# Altium PCB FMCOMMS3 - 副本 (2).PcbDoc (part 1 of 2)
Units mil, origin at the board's own origin, x right, y up, seen from the top; angles counter-clockwise.
Board outline 6000 x 4000 mil, 4 copper layers (Top Layer, Layer 1, Layer 2, Bottom Layer), stack 23.756 mil thick; 166 components, 138 nets, 751 pads, 368 vias.
Unrouted connection lines stored in the file: 399.
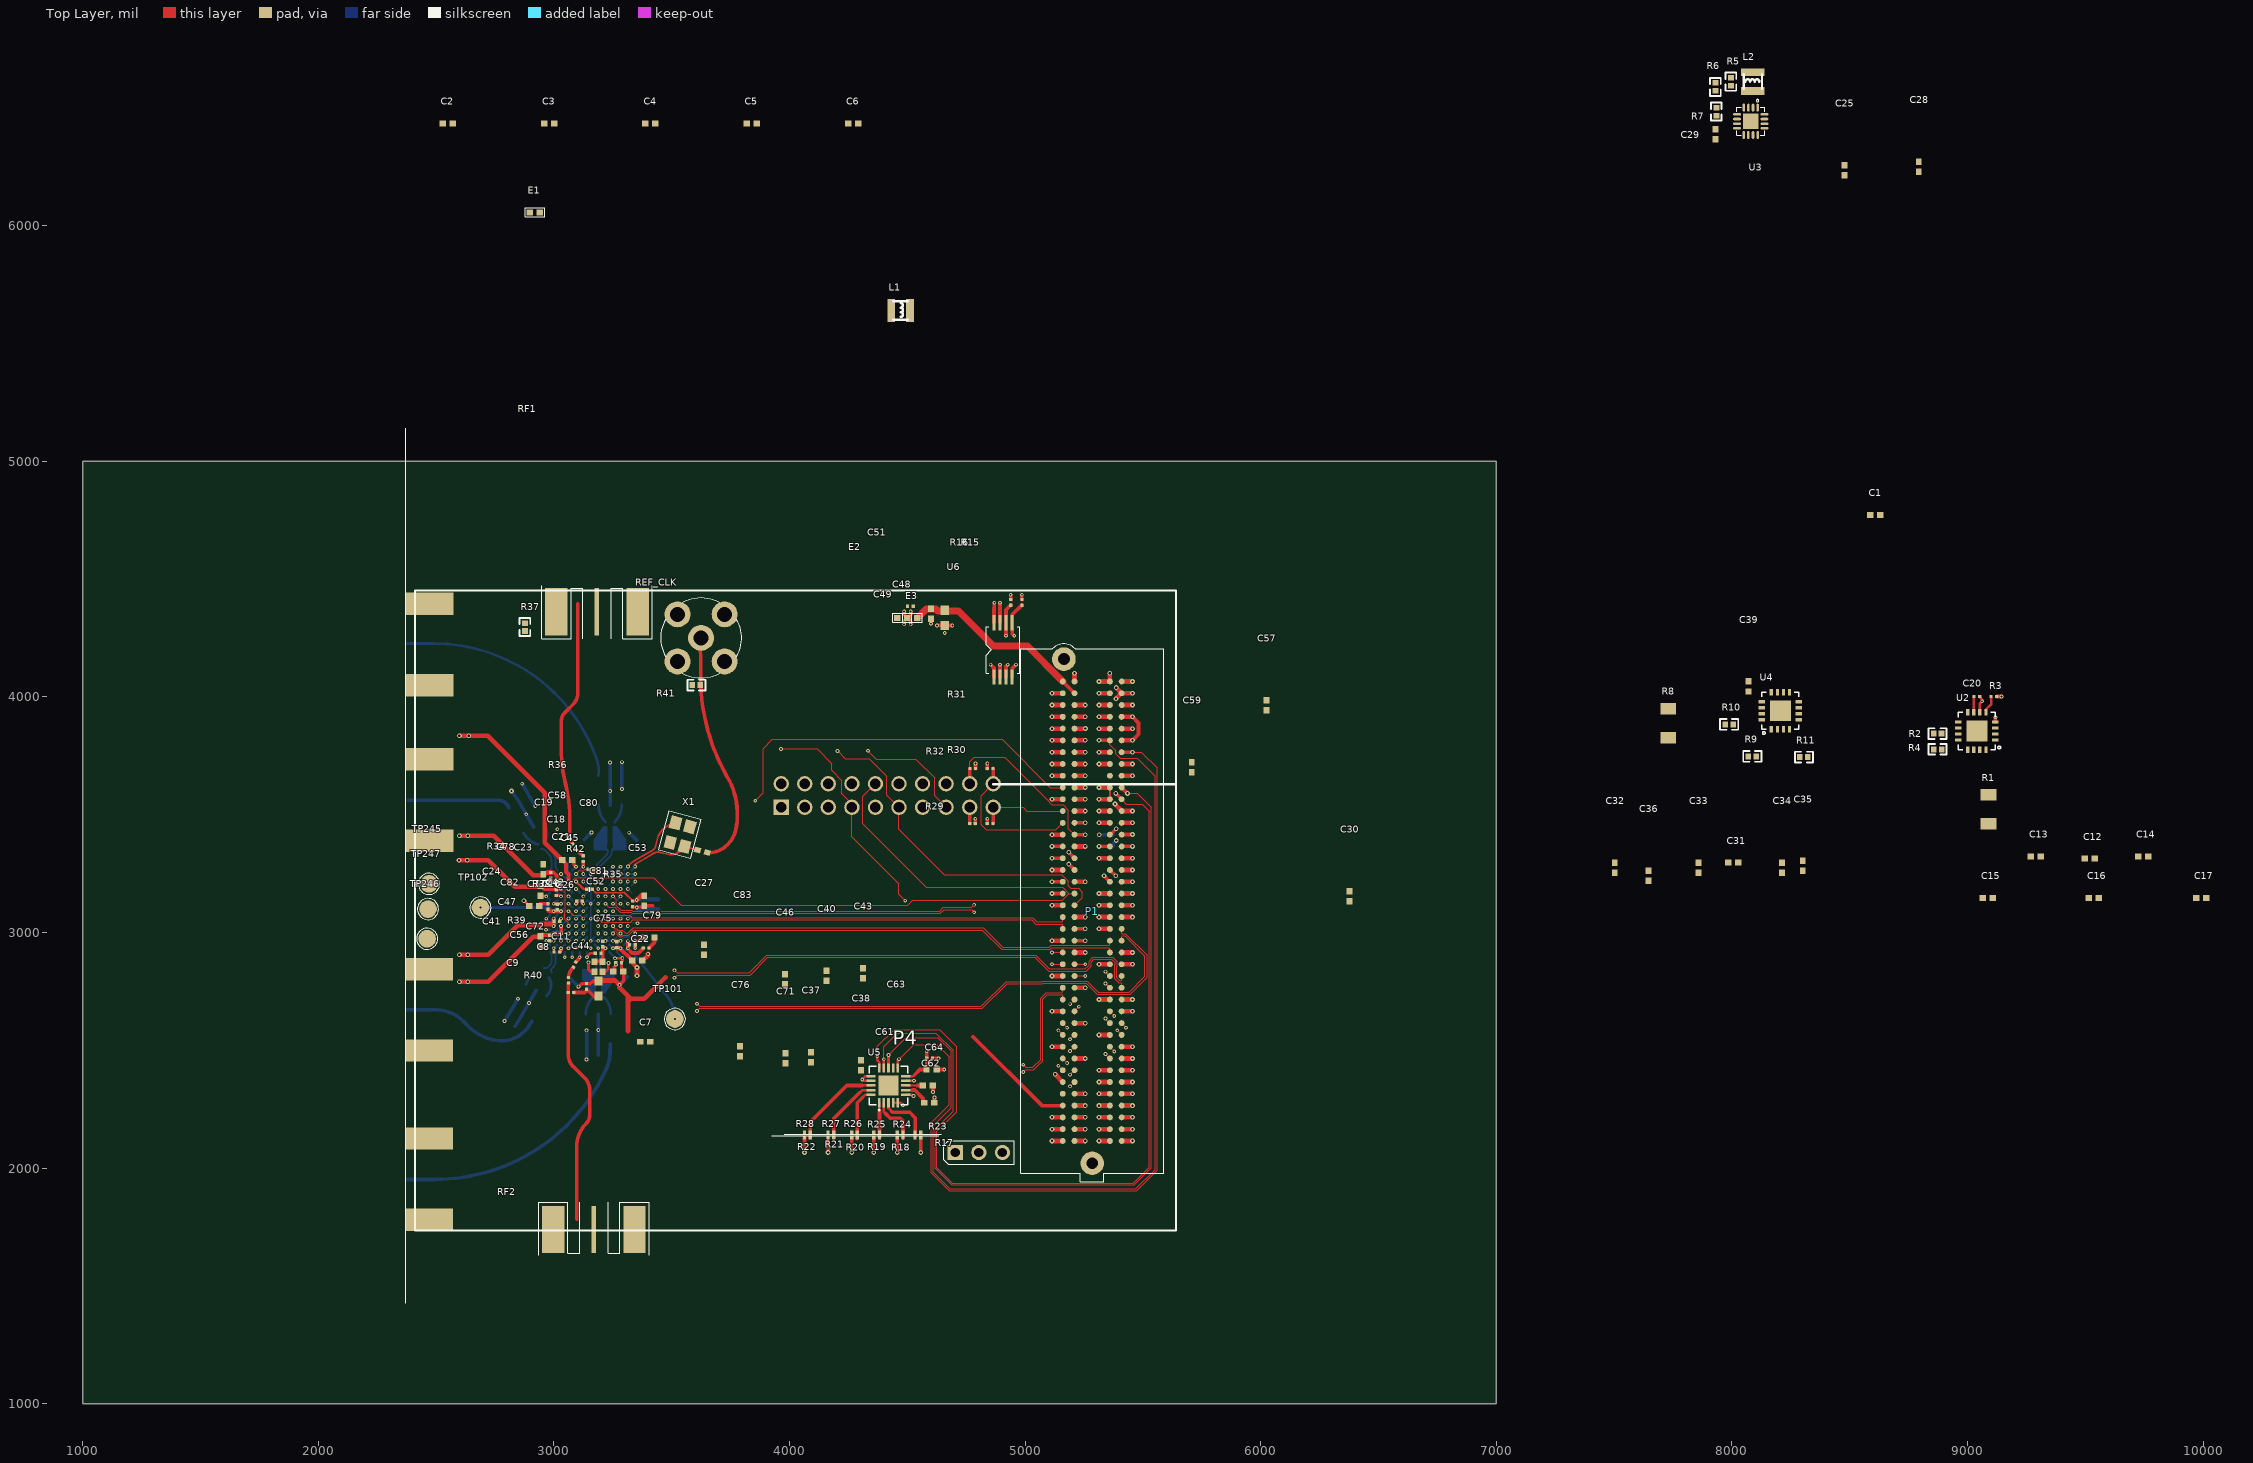
[diagram p0: Top Layer view]
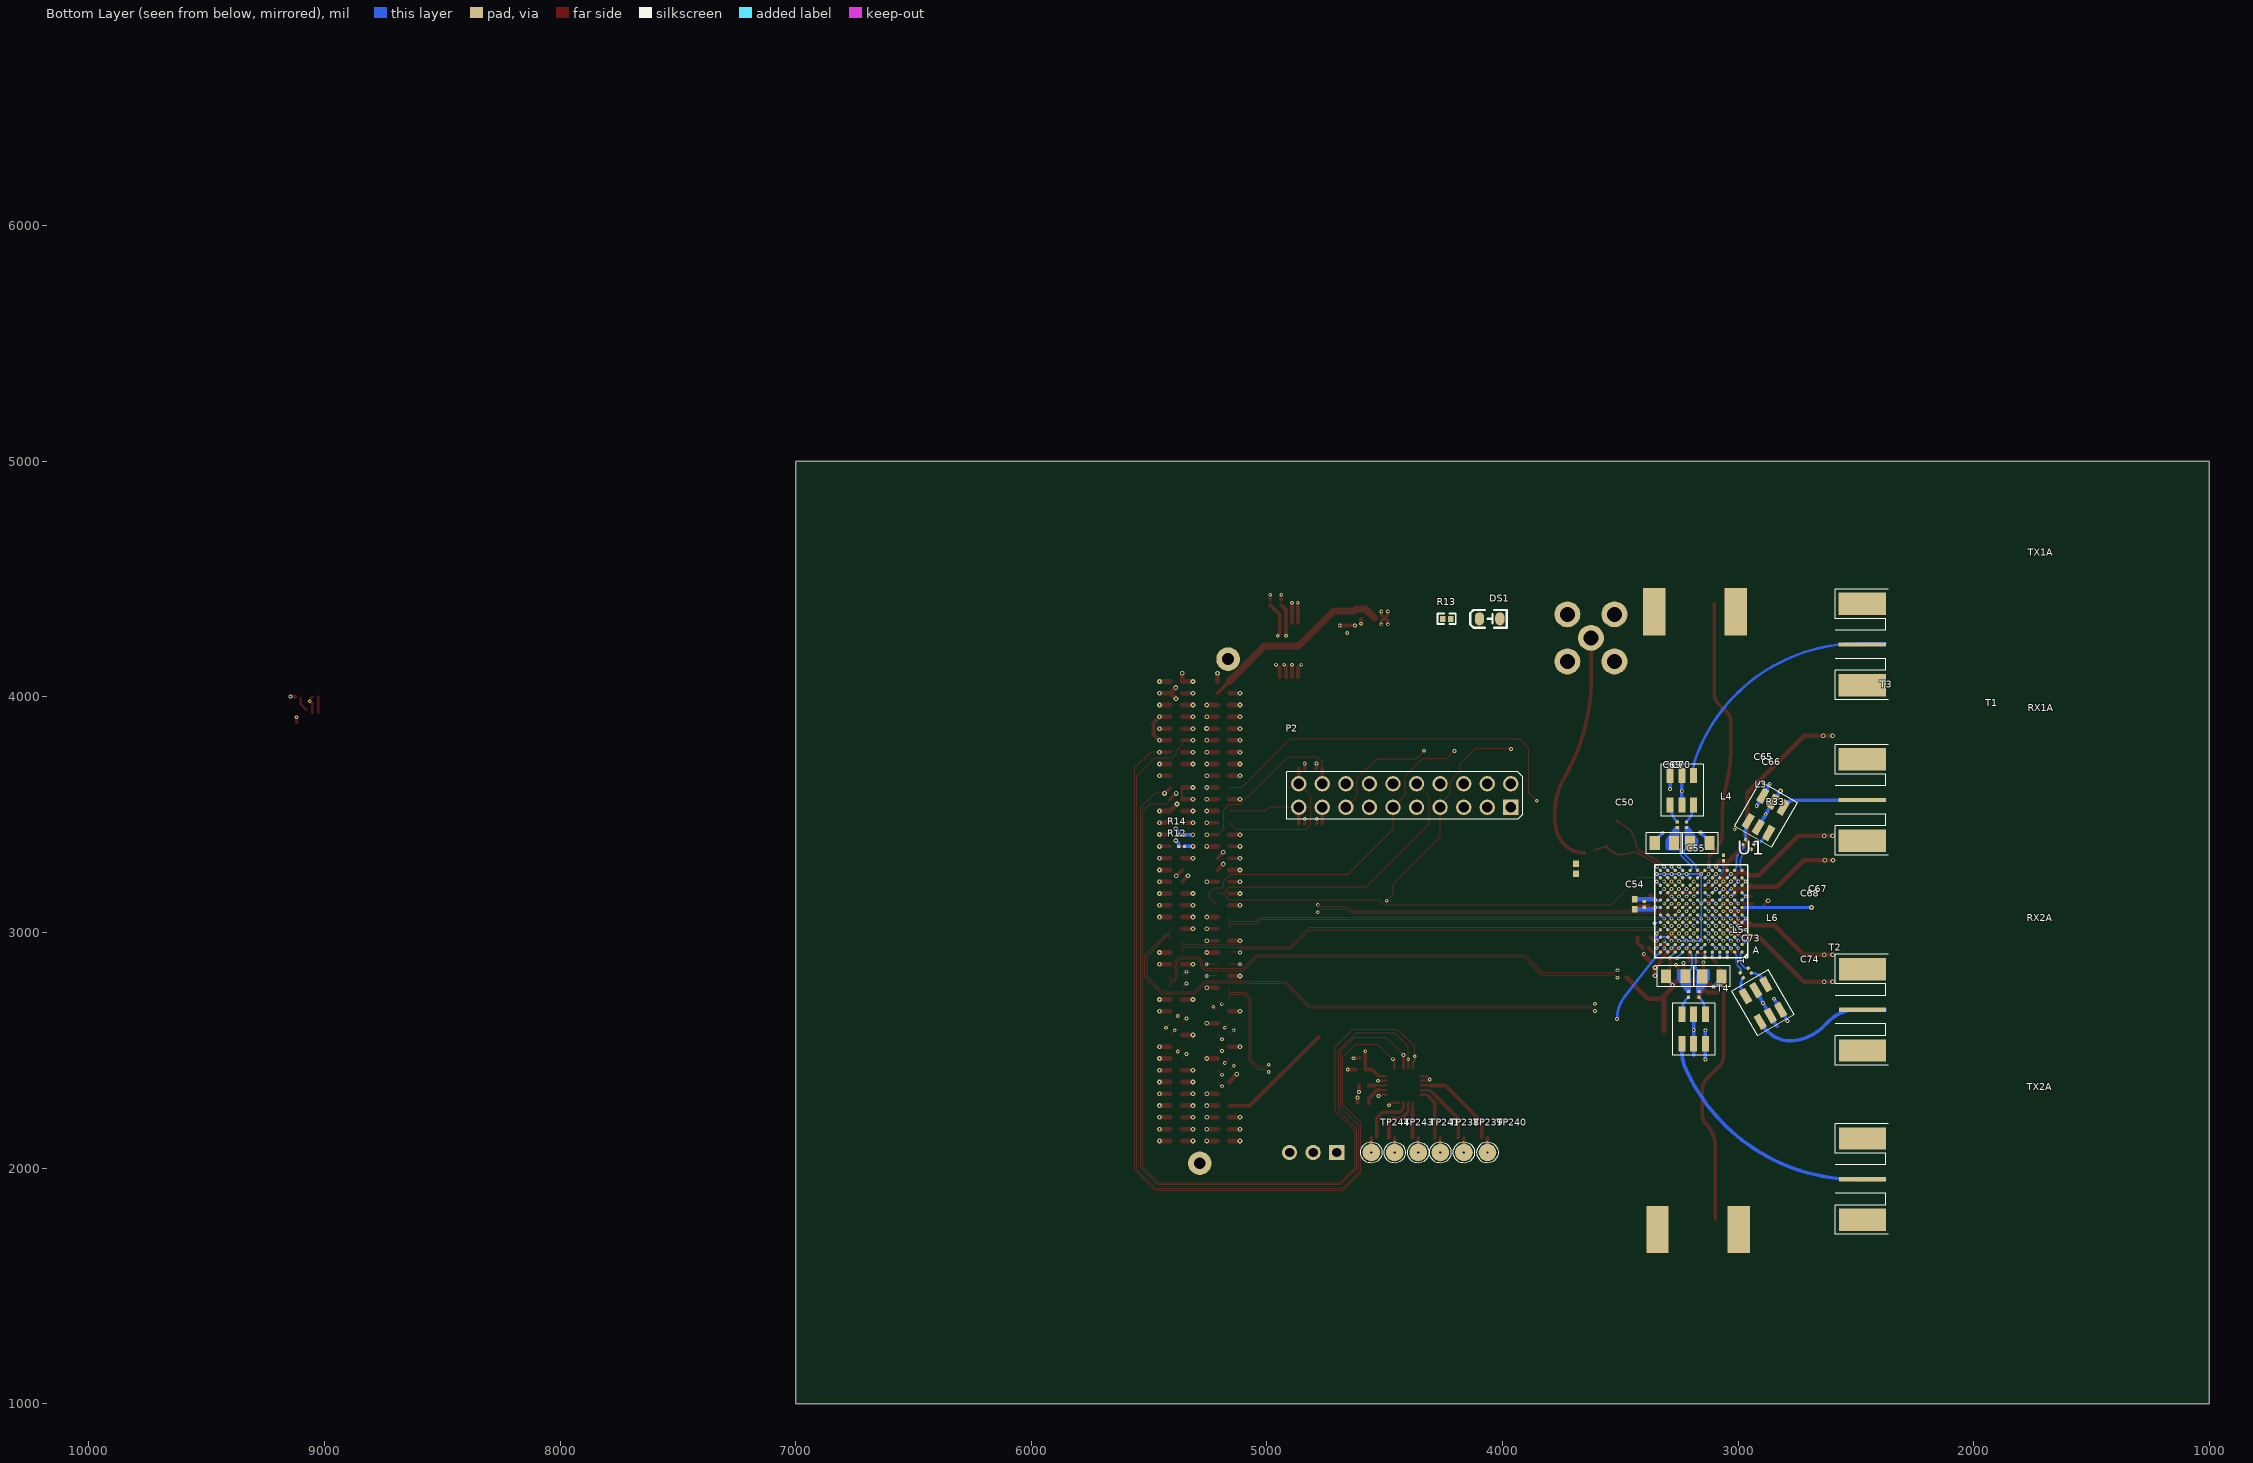
[diagram p1: Bottom Layer view, seen from below]
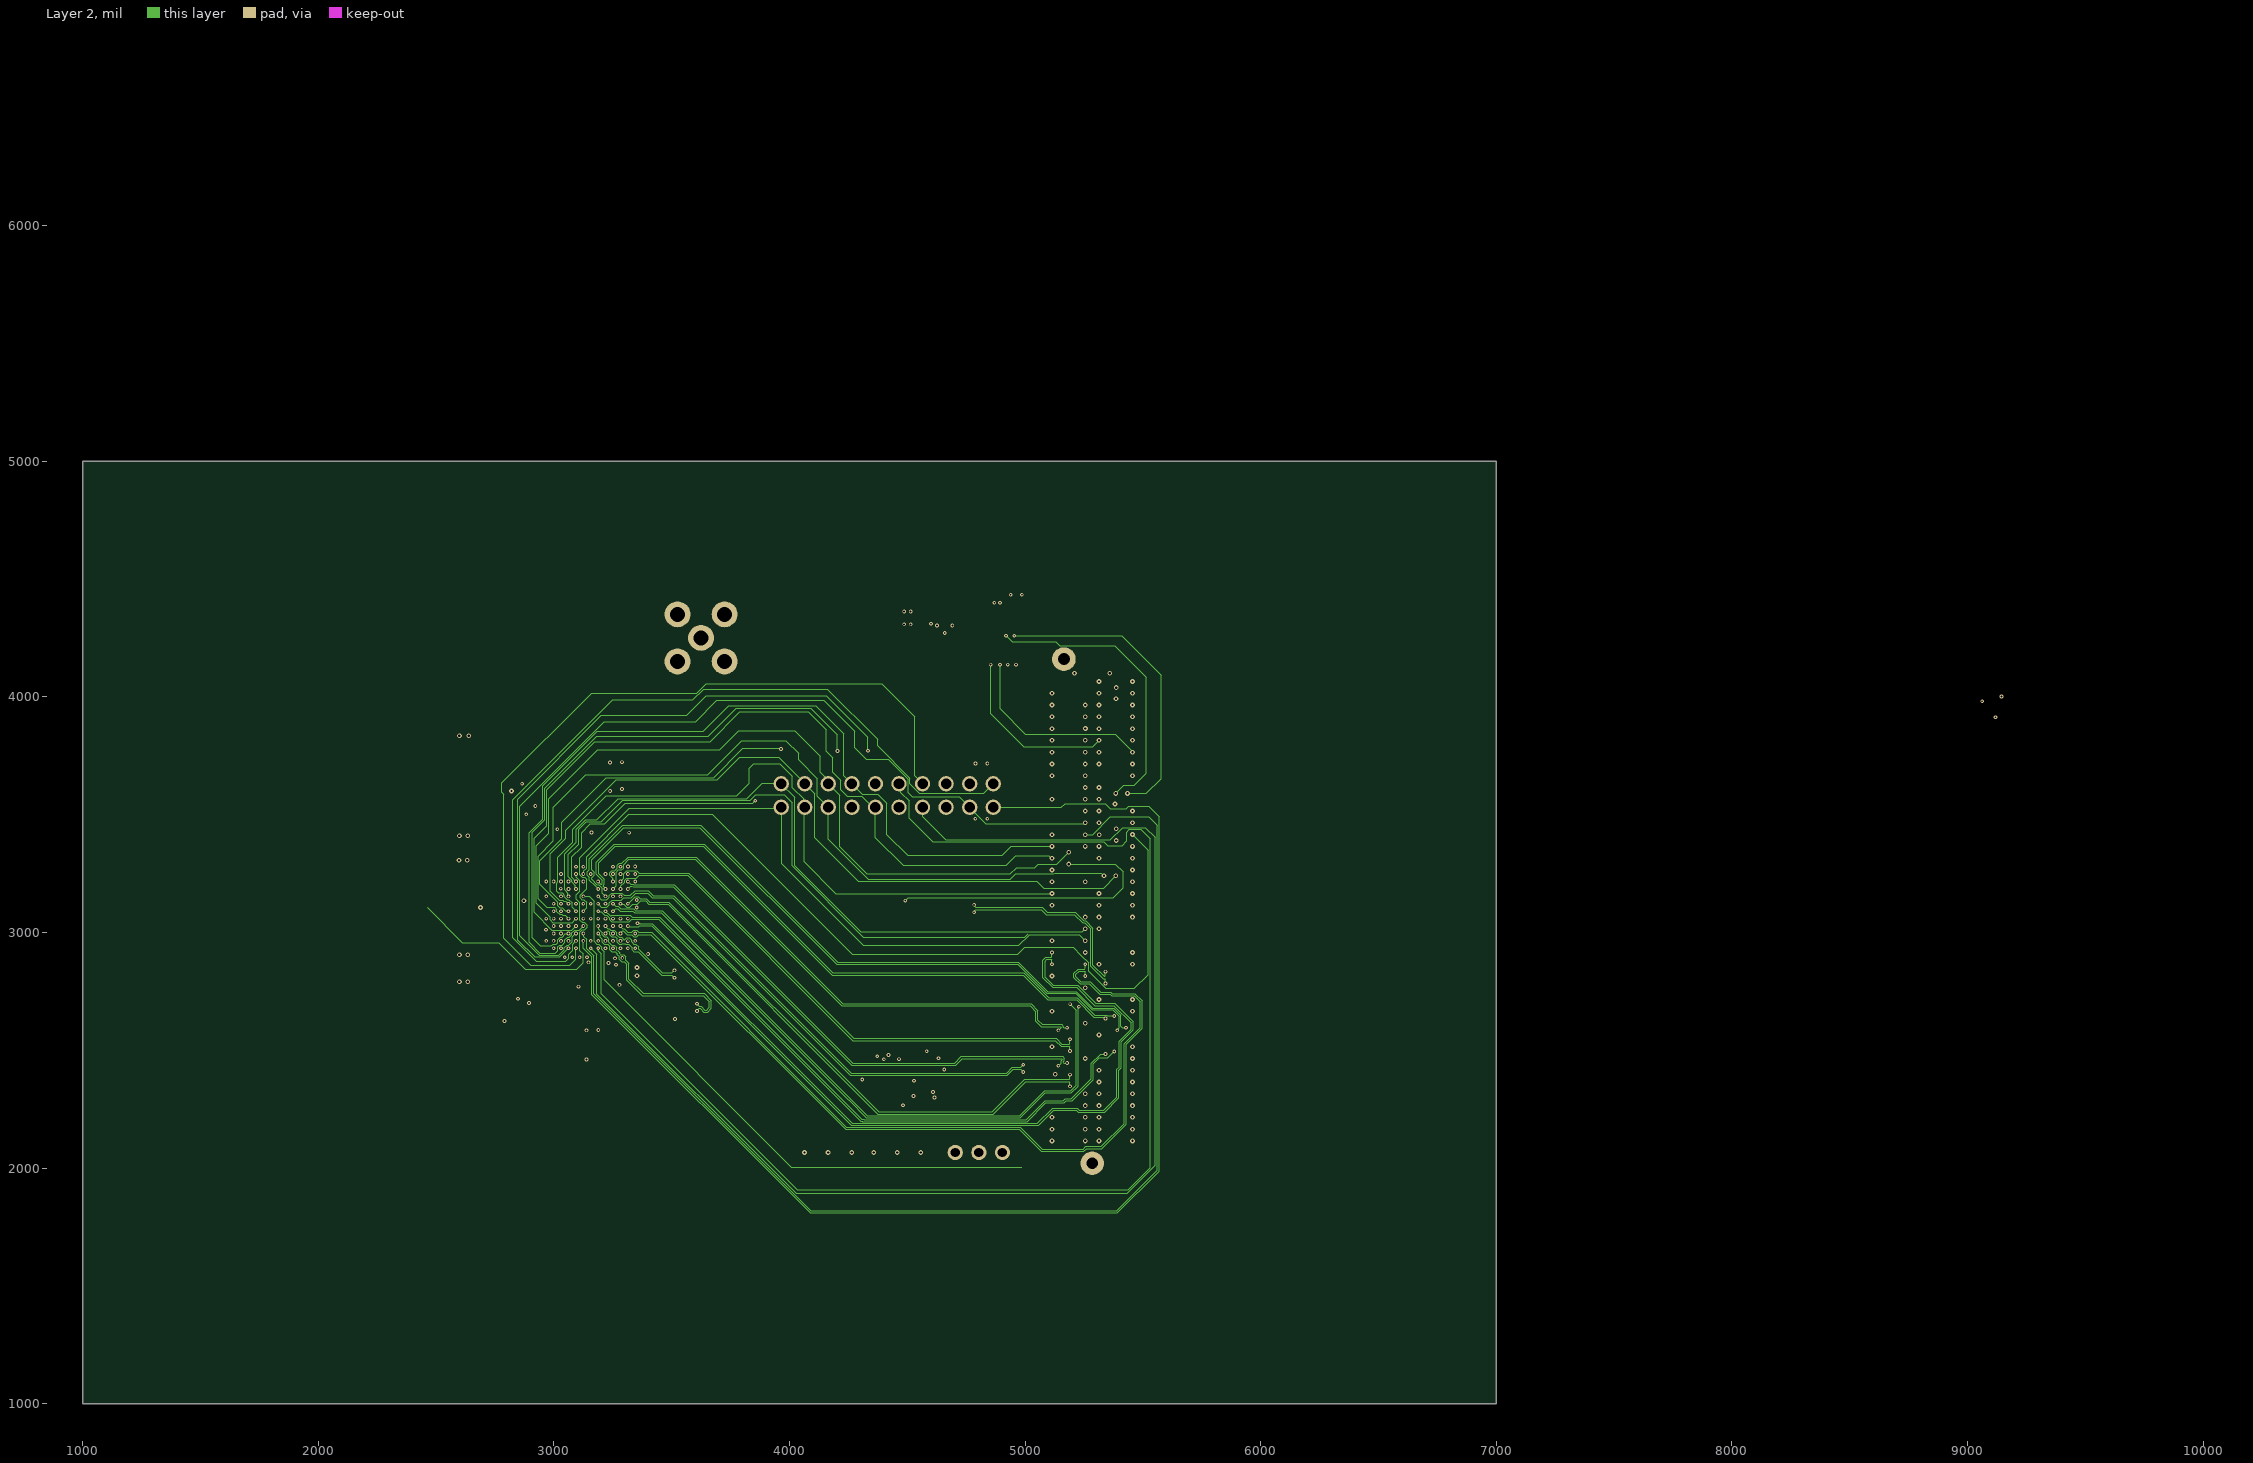
[diagram p2: Layer 2]

## Layer stack, top to bottom
Top Solder: solder mask 0.4, Solder Resist, Dk 3.5
Top Layer: signal copper 1.4
Dielectric 2: prepreg 2.8, PP-006, Dk 4.1
Layer 1: signal copper 1.378
Dielectric 1: dielectric 12.6, FR-4, Dk 4.8
Layer 2: signal copper 1.378
Dielectric 3: prepreg 2.8, PP-006, Dk 4.1
Bottom Layer: signal copper 1.4
Bottom Solder: solder mask 0.4, Solder Resist, Dk 3.5

## Board outline
1000,1000 7000,1000 7000,5000 1000,5000

## Design rules (kind name [scope] priority, off if disabled: settings)
Clearance Clearance_1 [All] p1: gap=4 ignorepadtopadclearanceinfootprint=FALSE
ComponentClearance [All] p1: gap=0 collisioncheckmode=3 verticalgap=0 showdistances=FALSE
DiffPairsRouting DiffPairsRouting_2 [InDifferentialPairClass('RX_TX_DATA')] p1: maxlimit=5 minlimit=4 mostfreqgap=5 toplayer_maxgap=4 toplayer_prefgap=4 toplayer_minwidth=4 toplayer_maxwidth=4.96 toplayer_prefwidth=4.96 midlayer1_minwidth=4 midlayer1_maxwidth=4.02 midlayer1_prefwidth=4.02 midlayer2_minwidth=4 midlayer2_maxwidth=4.02 midlayer2_prefwidth=4.02 bottomlayer_maxgap=4 bottomlayer_prefgap=4 bottomlayer_minwidth=4 bottomlayer_maxwidth=4.96 bottomlayer_prefwidth=4.96 maxuncoupledlength=500
DiffPairsRouting DiffPairsRouting_1 [InDifferentialPairClass('RF_DATA')] p2: maxlimit=10 minlimit=4 mostfreqgap=10 toplayer_mingap=8.08 toplayer_maxgap=8.08 toplayer_prefgap=8.08 toplayer_minwidth=8 toplayer_maxwidth=8 toplayer_prefwidth=8 midlayer1_minwidth=4 midlayer1_maxwidth=15 midlayer1_prefwidth=15 midlayer2_minwidth=4 midlayer2_maxwidth=15 midlayer2_prefwidth=15 bottomlayer_mingap=8.08 bottomlayer_maxgap=8.08 bottomlayer_prefgap=8.08 bottomlayer_minwidth=8 bottomlayer_maxwidth=8 bottomlayer_prefwidth=8 maxuncoupledlength=500
HoleToHoleClearance [All] p1: gap=4 allowstackedmicrovias=TRUE
MinimumSolderMaskSliver [All] p1: minsoldermaskwidth=4
PlaneClearance [InNetClass('rf')] p1: clearance=38
PolygonConnect [All] p1: connectstyle=Relief reliefconductorwidth=10 reliefentries=4 polygonreliefangle="90 Angle" airgapwidth=10
RoutingVias [All] p1: holewidth=7.87 width=15.75 viastyle="Through Hole" minholewidth=7.87 minwidth=15.75 maxholewidth=28 maxwidth=50
SilkToSilkClearance [All] p1: silktosilkclearance=4
SilkToSolderMaskClearance [IsPad] p1: minsilkscreentomaskgap=4 clearancetoexposedcopper=TRUE
SolderMaskExpansion [All] p1: expansion=4 istentingtop=FALSE
Width [All] p1: maxlimit=100 minlimit=4 preferedwidth=4
23 further rules are at their usual default settings.

## Classes and differential pairs
differential pair class RX_TX_DATA: DATA_CLK FB_CLK RX_D0 RX_D1 RX_D2 RX_D3 RX_D4 RX_D5 RX_FRAME TX_D0 TX_D1 TX_D2 TX_D3 TX_D4 TX_D5 TX_FRAME
component class "03 AD9361_Digital": C65 C66 C67 C68 C69 C70 C71 C72 C73 C74 C75 C76 C77 C78 C79 C80 C81 C82 C83 L3 L4 L5 L6 R33 R34 R35 R36 R37 R38 R39 R40 R41 R42 REF_CLK RF1 RF2 RX1A RX2A T1 T2 T3 T4 TP101 TP102 TX1A TX2A U1 X1
component class "02 LP_FMC": C56 C57 C58 C59 C61 C62 C63 C64 DS1 P1 P2 R12 R13 R14 R15 R16 R17 R18 R19 R20 R21 R22 R23 R24 R25 R26 R27 R28 R29 R30 R31 R32 TP238 TP239 TP240 TP241 TP243 TP244 TP245 TP246 TP247 U5 U6
component class "01 POWER": C1 C2 C3 C4 C5 C6 C7 C8 C9 C10 C11 C12 C13 C14 C15 C16 C17 C18 C19 C20 C21 C22 C23 C24 C25 C26 C27 C28 C29 C30 C31 C32 C33 C34 C35 C36 C37 C38 C39 C40 C41 C42 C43 C44 C45 C46 C47 C48 C49 C50 C51 C52 C53 C54 C55 E1 E2 E3 L1 L2 P4 R1 R2 R3 R4 R5 R6 R7 R8 R9 R10 R11 U2 U3 U4
differential pair TX_FRAME: +TX_FRAME_P -TX_FRAME_N
differential pair TX_D5: +TX_D5_P -TX_D5_N
differential pair TX_D4: +TX_D4_P -TX_D4_N
differential pair TX_D3: +TX_D3_P -TX_D3_N
differential pair TX_D2: +TX_D2_P -TX_D2_N
differential pair TX_D1: +TX_D1_P -TX_D1_N
differential pair TX_D0: +TX_D0_P -TX_D0_N
differential pair TX2A: +TX2A_P -TX2A_N
differential pair TX1A: +TX1A_P -TX1A_N
differential pair RX_FRAME: +RX_FRAME_P -RX_FRAME_N
differential pair RX_D5: +RX_D5_P -RX_D5_N
differential pair RX_D4: +RX_D4_P -RX_D4_N
differential pair RX_D3: +RX_D3_P -RX_D3_N
differential pair RX_D2: +RX_D2_P -RX_D2_N
differential pair RX_D1: +RX_D1_P -RX_D1_N
differential pair RX_D0: +RX_D0_P -RX_D0_N
differential pair RX2A: +RX2A_P -RX2A_N
differential pair RX1A: +RX1A_P -RX1A_N
differential pair FB_CLK: +FB_CLK_P -FB_CLK_N
differential pair DATA_CLK: +DATA_CLK_P -DATA_CLK_N

## Components (designator, comment, footprint, x,y, rotation, side; value= is the part's Value field where it differs from the comment)
C1 "0.1UF" C0402 8609,4772 r0 top
C2 "10UF" C0402 2550,6433 r0 top
C3 "0.1UF" C0402 2980,6433 r0 top
C4 "10UF" C0402 3410,6433 r0 top
C5 "0.1UF" C0402 3840,6433 r0 top
C6 "0.1UF" C0402 4270,6433 r0 top
C7 "0.1UF" C0402 3389,2536 r0 top
C8 "1UF" C0402 3173,2855 r270 top
C9 "1UF" C0402 3207,2855 r270 top
C10 "0.01UF" C0201 3208,2951 r90 top
C11 "0.01UF" C0201 3188,2912 r180 top
C12 "10UF" C0402 9519.75,3313 r0 top
C13 "10UF" C0402 9290.75,3323 r0 top
C14 "0.1UF" C0402 9745.75,3323 r0 top
C15 "0.1UF" C0402 9086.75,3146 r0 top
C16 "0.1UF" C0402 9536.75,3146 r0 top
C17 "0.1UF" C0402 9991.75,3146 r0 top
C18 "0.01UF" C0201 2987,3242 r270 top
C19 "1UF" C0402 2955,3268 r90 top
C20 "0.01UF" C0201 9040,4001 r0 top
C21 "0.01UF" C0201 3010,3169 r270 top
C22 "1UF" C0402 3355,2880 r0 top
C23 "0.01UF" C0201 3013,3047 r0 top
C24 "1UF" C0402 2943,3176 r270 top
C25 "10μF" C0402 8478,6235 r90 top
C26 "0.01UF" C0201 3267,2948 r90 top
C27 "1UF" C0402 3638,2926 r90 top
C28 "10μF" C0402 8793,6250 r90 top
C29 "0.1μF" C0402 7930,6387 r270 top
C30 "0.1UF" C0402 6377,3152.75 r90 top
C31 "10UF" C0402 8006.75,3296 r0 top
C32 "10UF" C0402 7503,3274 r90 top
C33 "0.1UF" C0402 7858,3274 r90 top
C34 "0.1UF" C0402 8213,3274 r90 top
C35 "0.1UF" C0402 8301,3282 r90 top
C36 "0.1UF" C0402 7646,3241 r90 top
C37 "0.01UF" C0402 4092,2469.75 r90 top
C38 "1UF" C0402 4304,2436 r90 top
C39 "0.01UF" C0402 8071,4043.75 r90 top
C40 "0.01UF" C0402 4157,2817 r90 top
C41 "1UF" C0402 2943,2963 r270 top
C42 "0.01UF" C0201 2983,2976 r270 top
C43 "1UF" C0402 4312,2827 r90 top
C44 "0.01UF" C0201 3275,2871 r180 top
C45 "1UF" C0402 3057,3307 r0 top
C46 "0.01UF" C0402 3981,2802 r90 top
C47 "1UF" C0402 3274,2834 r180 top
C48 "10UF" C0603 4659,4335 r270 top
C49 "0.1UF" C0402 4601,4352 r270 top
C50 "10UF" C0402 3689,3269.75 r90 bottom
C51 "0.1UF" C0201 4513,4384 r0 top
C52 "1UF" C0402 3384,3134 r270 top
C53 "0.01UF" C0201 3334,3121 r270 top
C54 "1UF" C0402 3439,3120 r270 bottom
C55 "0.01UF" C0201 3399,3119 r270 bottom
C56 "0.1UF" C0201 3013,2917 r180 top
C57 "0.1UF" C0402 6024,3964.25 r90 top
C58 "0.1UF" C0201 3158,3268 r0 top
C59 "0.1UF" C0402 5707.54,3700.75 r90 top
C61 "10UF" C0402 4594,2277 r180 top
C62 "1UF" C0402 4588,2350 r0 top
C63 "0.1UF" C0201 4595,2466 r0 top
C64 "10UF" C0402 4603,2418 r0 top
C65 "18PF" C0201 2973.64,3383.39 r120 bottom
C66 "18PF" C0201 2939,3363.39 r120 bottom
C67 "18PF" C0201 2951,2838 r240 bottom
C68 "18PF" C0201 2985,2818 r240 bottom
C69 "18PF" C0201 3258,3457 r90 bottom
C70 "18PF" C0201 3219,3457 r90 bottom
C71 "10UF" C0402 3983,2465.75 r90 top
C72 "1000PF" C0201 3139,2771 r90 top
C73 "18PF" C0201 3166,2737 r270 bottom
C74 "18PF" C0201 3211,2737 r270 bottom
C75 "10UF" C0603 3190,2762 r90 top
C76 "1000PF" C0402 3791,2494.75 r90 top
C77 "1UF" C0402 2917,3112 r0 top
C78 "1000PF" C0201 3015,3108 r90 top
C79 "1UF" C0402 3406,2979 r0 top
C80 "1000PF" C0201 3125,3313 r270 top
C81 "1000PF" C0201 3333,2948 r0 top
C82 "1000PF" C0201 3088,2863 r65 top
C83 "0.1UF" C0402 3630.53,3344.5 r345 top
DS1 "16-213SURC/S530-A3/TR8" LED0805-RD 4054.69,4331 r180 bottom
E1 "750OHM" L0402 2920,6056 r0 top
E2 "750OHM" L0402 4479,4335 r180 top
E3 "750OHM" L0402 4522,4335 r0 top
L1 "0.47UH" L1008 4472,5640 r0 top
L2 "2.2UH" L1008 8089,6610.92 r90 top
L3 "330NH" L0805-F 3313,3379 r0 bottom
L4 "330NH" L0805-F 3163,3379 r180 bottom
L5 "330NH" L0805-F 3111.19,2813 r180 bottom
L6 "330NH" L0805-F 3265,2814 r0 bottom
P1 "ASP-134604-01" CNSAMTECASP-134604-01 5285,3083.5 r90 top locked
P2 "Header 10X2" CNBERGF2X10H335LD32 4415,3581 r0 bottom locked
P4 "Header 3" CNBERG1X3H205LD36 4804,2066 r0 top locked
R1 "0" R1206 9089,3522.5 r270 top
R2 "16K" LC-0402_R 8873,3844 r0 top
R3 "10K" C0201 9112,4001 r180 top
R4 "10K" LC-0402_R 8873.27,3777 r180 top
R5 "10K" LC-0402_R 7996,6610.73 r270 top
R6 "18.7K" LC-0402_R 7930,6588.73 r270 top
R7 "15K" LC-0402_R 7934,6483.73 r270 top
R8 "0" R1206 7730,3888 r270 top
R9 "16K" LC-0402_R 8087,3747 r0 top
R10 "10K" LC-0402_R 7988.73,3883 r180 top
R11 "10K" LC-0402_R 8305.73,3744 r0 top
R12 "10K" C0201 5362,3365 r0 bottom
R13 "237" LC-0402_R 4237.27,4331 r180 bottom
R14 "49.9" C0201 5362,3415 r180 bottom
R15 "2K" C0201 4987,4401 r90 top
R16 "2K" C0201 4939,4401 r90 top
R17 "10K" C0201 4545,2128 r180 top
R18 "10K" C0201 4470,2128 r0 top
R19 "10K" C0201 4370,2128 r0 top
R20 "10K" C0201 4276,2128 r0 top
R21 "10K" C0201 4176,2128 r0 top
R22 "10K" C0201 4076,2128 r0 top
R23 "16K" C0201 4545,2152 r0 top
R24 "16K" C0201 4470,2152 r180 top
R25 "16K" C0201 4370,2152 r180 top
R26 "16K" C0201 4276,2152 r180 top
R27 "16K" C0201 4176,2152 r180 top
R28 "16K" C0201 4076,2152 r180 top
R29 "10K" C0201 4777,3462 r180 top
R30 "10K" C0201 4852,3462 r0 top
R31 "10K" C0201 4852,3696 r0 top
R32 "10K" C0201 4778,3696 r180 top
R33 "14.3K" C0201 3062,3316 r270 bottom
R34 "1" C0201 2975,3110 r90 top
R35 "1" C0201 3392,2934 r0 top
R36 "10" C0201 3087,3365 r300 top
R37 "49.9" LC-0402_R 2877,4296 r90 top
R38 "10K" C0201 3109,3133 r180 top
R39 "10" C0201 3062,2797 r90 top
R40 "49.9" C0201 3073,2745 r180 top
R41 "49.9" LC-0402_R 3605,4050 r0 top
R42 "10K" R0201 3151,3183 r180 top
REF_CLK "DOSIN-806-0010" CNJOHNSON142-0701-201 3625,4250 r90 top
RF1 "DOSIN-806-0010" CNSMARAL687W375H171 3183,4358.5 r90 top
RF2 "DOSIN-806-0010" CNSMARAL687W375H171 3170,1741.5 r270 top
RX1A "DOSIN-806-0010" CNSMARAL687W375H171 2476,3562 r180 bottom
RX2A "DOSIN-806-0010" CNSMARAL687W375H171 2475.5,2671.5 r180 bottom
T1 "TCM1-63AX+" TSML150W160H160 2883.07,3501.08 r210 bottom
T2 "TCM1-63AX+" TSML150W160H160 2894.36,2700.71 r330 bottom
T3 "TCM1-63AX+" TSML150W160H160 3239,3603.5 r180 bottom
T4 "TCM1-63AX+" TSML150W160H160 3189,2589.5 r0 bottom
TP101 "TEST POINT SURFACE" TPC75D45 3513.97,2632.5 r90 top
TP102 "TEST POINT SURFACE" TPC75D45 2688.72,3105.51 r90 top
TP238 "TEST POINT SURFACE" TPC75D45 4264,2066 r90 bottom
TP239 "TEST POINT SURFACE" TPC75D45 4164,2066 r90 bottom
TP240 "TEST POINT SURFACE" TPC75D45 4064,2066 r90 bottom
TP241 "TEST POINT SURFACE" TPC75D45 4358,2066 r90 bottom
TP243 "TEST POINT SURFACE" TPC75D45 4458,2066 r90 bottom
TP244 "TEST POINT SURFACE" TPC75D45 4557,2066 r90 bottom
TP245 "TEST POINT SURFACE" TPC75D45 2470,3206 r180 top
TP246 "TEST POINT SURFACE" TPC75D45 2462,2973 r180 top
TP247 "TEST POINT SURFACE" TPC75D45 2466,3099 r180 top
TX1A "DOSIN-806-0010" CNSMARAL687W375H171 2476,4222 r180 bottom
TX2A "DOSIN-806-0010" CNSMARAL687W375H171 2475.5,1953 r180 bottom
U1 "AD9363" AD936X 3120.51,3081.28 r0 bottom locked
U2 "ADP1755ACPZ-R7" LFCSP-WQ-16_L4.0-W4.0-P0.65-EP2.3-BL-EP 9039.74,3854.79 r90 top
U3 "TLV62130" TLV62130RGT 8080,6442 r180 top
U4 "ADP1755ACPZ-R7" LFCSP-WQ-16_L4.0-W4.0-P0.65-EP2.3-BL-EP 8206,3941 r0 top
U5 "AD7291BCPZ-RL7" LFCSP-20_L4.0-W4.0-P0.50-TL-EP2.7 4420.31,2350.52 r90 top locked
U6 "M24C02-WDW6TP" TSSOP8 4906.61,4198.96 r0 top
X1 "40MHz" XTALNX3225 3535.78,3415 r75 top

## Footprints (in the part's own frame and the unit in brackets; to place one, negate y for a bottom-side part, rotate by r counter-clockwise, add the part's x,y. Pads: shape width x height; smd on the part's side, far side on the other; paste and mask are expansions set on the pad)
AD936X [mil]
  round 14 smd: A1(-137.01,164.51) A2(-105.51,164.51) A3(-74.02,164.51) A4(-42.52,164.51) A5(-11.02,164.51) A6(20.47,164.51) A7(51.97,164.51) A8(83.46,164.51) A9(114.96,164.51) A10(146.46,164.51) A11(177.95,164.51) A12(209.45,164.51) B1(-137.01,133.01) B2(-105.51,133.01) B3(-74.02,133.01) B4(-42.52,133.01) B5(-11.02,133.01) B6(20.47,133.01) B7(51.97,133.01) B8(83.46,133.01) B9(114.96,133.01) B10(146.46,133.01) B11(177.95,133.01) B12(209.45,133.01) C1(-137.01,101.52) C2(-105.51,101.52) C3(-74.02,101.52) C4(-42.52,101.52) C5(-11.02,101.52) C6(20.47,101.52) C7(51.97,101.52) C8(83.46,101.52) C9(114.96,101.52) C10(146.46,101.52) C11(177.95,101.52) C12(209.45,101.52) D1(-137.01,70.02) D2(-105.51,70.02) D3(-74.02,70.02) D4(-42.52,70.02) D5(-11.02,70.02) D6(20.47,70.02) D7(51.97,70.02) D8(83.46,70.02) D9(114.96,70.02) D10(146.46,70.02) D11(177.95,70.02) D12(209.45,70.02) E1(-137.01,38.52) E2(-105.51,38.52) E3(-74.02,38.52) E4(-42.52,38.52) E5(-11.02,38.52) E6(20.47,38.52) E7(51.97,38.52) E8(83.46,38.52) E9(114.96,38.52) E10(146.46,38.52) E11(177.95,38.52) E12(209.45,38.52) F1(-137.01,7.03) F2(-105.51,7.03) F3(-74.02,7.03) F4(-42.52,7.03) F5(-11.02,7.03) F6(20.47,7.03) F7(51.97,7.03) F8(83.46,7.03) F9(114.96,7.03) F10(146.46,7.03) F11(177.95,7.03) F12(209.45,7.03) G1(-137.01,-24.47) G2(-105.51,-24.47) G3(-74.02,-24.47) G4(-42.52,-24.47) G5(-11.02,-24.47) G6(20.47,-24.47) G7(51.97,-24.47) G8(83.46,-24.47) G9(114.96,-24.47) G10(146.46,-24.47) G11(177.95,-24.47) G12(209.45,-24.47) H1(-137.01,-55.96) H2(-105.51,-55.96) H3(-74.02,-55.96) H4(-42.52,-55.96) H5(-11.02,-55.96) H6(20.47,-55.96) H7(51.97,-55.96) H8(83.46,-55.96) H9(114.96,-55.96) H10(146.46,-55.96) H11(177.95,-55.96) H12(209.45,-55.96) J1(-137.01,-87.46) J2(-105.51,-87.46) J3(-74.02,-87.46) J4(-42.52,-87.46) J5(-11.02,-87.46) J6(20.47,-87.46) J7(51.97,-87.46) J8(83.46,-87.46) J9(114.96,-87.46) J10(146.46,-87.46) J11(177.95,-87.46) J12(209.45,-87.46) K1(-137.01,-118.96) K2(-105.51,-118.96) K3(-74.02,-118.96) K4(-42.52,-118.96) K5(-11.02,-118.96) K6(20.47,-118.96) K7(51.97,-118.96) K8(83.46,-118.96) K9(114.96,-118.96) K10(146.46,-118.96) K11(177.95,-118.96) K12(209.45,-118.96) L1(-137.01,-150.45) L2(-105.51,-150.45) L3(-74.02,-150.45) L4(-42.52,-150.45) L5(-11.02,-150.45) L6(20.47,-150.45) L7(51.97,-150.45) L8(83.46,-150.45) L9(114.96,-150.45) L10(146.46,-150.45) L11(177.95,-150.45) L12(209.45,-150.45) M1(-137.01,-181.95) M2(-105.51,-181.95) M3(-74.02,-181.95) M4(-42.52,-181.95) M5(-11.02,-181.95) M6(20.47,-181.95) M7(51.97,-181.95) M8(83.46,-181.95) M9(114.96,-181.95) M10(146.46,-181.95) M11(177.95,-181.95) M12(209.45,-181.95)
  silkscreen extent -161,-206 233,188
C0201 [mil] "C0201"
  rect 14x14 smd: 1(-12,0) 2(12,0)
C0402 [mil] "C0402"
  rect 27.5x25 smd: 1(-21.25,0) 2(21.25,0)
C0603 [mil] "C0603"
  rect 38.5x35 smd: 1(-32.25,0) 2(32.25,0)
CNBERG1X3H205LD36 [mil] "CNBERG1X3H205LD36"
  rect 65x65 / inner round 65 / far side rect 65x65 hole 40: 1(-100,0)
  round 65 hole 40: 2(0,0) 3(100,0)
  silkscreen extent -150,-50 150,50
CNBERGF2X10H335LD32 [mil] "CNBERGF2X10H335LD32"
  rect 65x65 / inner round 65 / far side rect 65x65 hole 45: 1(-450,50)
  round 65 hole 45: 2(-450,-50) 3(-350,50) 4(-350,-50) 5(-250,50) 6(-250,-50) 7(-150,50) 8(-150,-50) 9(-50,50) 10(-50,-50) 11(50,50) 12(50,-50) 13(150,50) 14(150,-50) 15(250,50) 16(250,-50) 17(350,50) 18(350,-50) 19(450,50) 20(450,-50)
  silkscreen extent -500,-100 500,100
CNJOHNSON142-0701-201 [mil] "CNJOHNSON142-0701-201"
  round 110 hole 63: 1(100,100) 2(100,-100) 3(-100,-100) 4(-100,100) 5(0,0)
  silkscreen extent -169,-172 169,172
CNSAMTECASP-134604-01 [mil] "CNSAMTECASP-134604-01"
  round 25 smd: C1(-968.5,-125) C2(-918.5,-125) C3(-868.5,-125) C4(-818.5,-125) C5(-768.5,-125) C6(-718.5,-125) C7(-668.5,-125) C8(-618.5,-125) C9(-568.5,-125) C10(-518.5,-125) C11(-468.5,-125) C12(-418.5,-125) C13(-368.5,-125) C14(-318.5,-125) C15(-268.5,-125) C16(-218.5,-125) C17(-168.5,-125) C18(-118.5,-125) C19(-68.5,-125) C20(-18.5,-125) C21(31.5,-125) C22(81.5,-125) C23(131.5,-125) C24(181.5,-125) C25(231.5,-125) C26(281.5,-125) C27(331.5,-125) C28(381.5,-125) C29(431.5,-125) C30(481.5,-125) C31(531.5,-125) C32(581.5,-125) C33(631.5,-125) C34(681.5,-125) C35(731.5,-125) C36(781.5,-125) C37(831.5,-125) C38(881.5,-125) C39(931.5,-125) C40(981.5,-125) D1(-968.5,-75) D2(-918.5,-75) D3(-868.5,-75) D4(-818.5,-75) D5(-768.5,-75) D6(-718.5,-75) D7(-668.5,-75) D8(-618.5,-75) D9(-568.5,-75) D10(-518.5,-75) D11(-468.5,-75) D12(-418.5,-75) D13(-368.5,-75) D14(-318.5,-75) D15(-268.5,-75) D16(-218.5,-75) D17(-168.5,-75) D18(-118.5,-75) D19(-68.5,-75) D20(-18.5,-75) D21(31.5,-75) D22(81.5,-75) D23(131.5,-75) D24(181.5,-75) D25(231.5,-75) D26(281.5,-75) D27(331.5,-75) D28(381.5,-75) D29(431.5,-75) D30(481.5,-75) D31(531.5,-75) D32(581.5,-75) D33(631.5,-75) D34(681.5,-75) D35(731.5,-75) D36(781.5,-75) D37(831.5,-75) D38(881.5,-75) D39(931.5,-75) D40(981.5,-75) G1(-968.5,75) G2(-918.5,75) G3(-868.5,75) G4(-818.5,75) G5(-768.5,75) G6(-718.5,75) G7(-668.5,75) G8(-618.5,75) G9(-568.5,75) G10(-518.5,75) G11(-468.5,75) G12(-418.5,75) G13(-368.5,75) G14(-318.5,75) G15(-268.5,75) G16(-218.5,75) G17(-168.5,75) G18(-118.5,75) G19(-68.5,75) G20(-18.5,75) G21(31.5,75) G22(81.5,75) G23(131.5,75) G24(181.5,75) G25(231.5,75) G26(281.5,75) G27(331.5,75) G28(381.5,75) G29(431.5,75) G30(481.5,75) G31(531.5,75) G32(581.5,75) G33(631.5,75) G34(681.5,75) G35(731.5,75) G36(781.5,75) G37(831.5,75) G38(881.5,75) G39(931.5,75) G40(981.5,75) H1(-968.5,125) H2(-918.5,125) H3(-868.5,125) H4(-818.5,125) H5(-768.5,125) H6(-718.5,125) H7(-668.5,125) H8(-618.5,125) H9(-568.5,125) H10(-518.5,125) H11(-468.5,125) H12(-418.5,125) H13(-368.5,125) H14(-318.5,125) H15(-268.5,125) H16(-218.5,125) H17(-168.5,125) H18(-118.5,125) H19(-68.5,125) H20(-18.5,125) H21(31.5,125) H22(81.5,125) H23(131.5,125) H24(181.5,125) H25(231.5,125) H26(281.5,125) H27(331.5,125) H28(381.5,125) H29(431.5,125) H30(481.5,125) H31(531.5,125) H32(581.5,125) H33(631.5,125) H34(681.5,125) H35(731.5,125) H36(781.5,125) H37(831.5,125) H38(881.5,125) H39(931.5,125) H40(981.5,125)
  round 100 hole 50 unplated: ""(-1063.5,0) ""(1076.5,120)
  silkscreen extent -1142,-304 1141,304
CNSMARAL687W375H171 [mil]
  rect 200x95 smd far side: 1(2.5,-172.5) 3(2.5,172.5)
  rect 200x95 smd: 2(2.5,172.5) 4(2.5,-172.5)
  rect 200x19 smd: 5(2.5,0)
  silkscreen extent -113,-235 113,235
L0402 [mil] "L0402"
  rect 27.5x25 smd: 1(-21.25,0) 2(21.25,0)
  silkscreen extent -41,-19 41,19
L0805-F [mil] "L0805-F"
  rect 43x59 smd: 1(41.19,0) 2(-41.19,0)
  silkscreen extent -78,-44 78,44
L1008 [mil]
  rect 33.5x98.4 smd: 1(-39.92,0) 2(40.08,0)
  silkscreen extent -31,-39 31,39
LC-0402_R [mm]
  rect 0.6x0.65 smd mask+0.051: 1(-0.425,0) 2(0.425,0)
  silkscreen extent -0.97,-0.58 0.97,0.58, body extent -0.57,-0.27 0.58,0.28, height 0.41
LED0805-RD [mm]
  oval 1x1.4 smd: 1(-1.1,0) 2(1.1,0)
  silkscreen extent -2.1,-0.95 1.85,0.95
LFCSP-20_L4.0-W4.0-P0.50-TL-EP2.7 [mm]
  rect 0.985x0.28 smd: 1(-1.868,1) 2(-1.868,0.5) 3(-1.868,0) 4(-1.868,-0.5) 5(-1.868,-1) 11(1.868,-1) 12(1.868,-0.5) 13(1.868,0) 14(1.868,0.5) 15(1.868,1)
  rect 0.28x0.985 smd: 6(-1,-1.868) 7(-0.5,-1.868) 8(0,-1.868) 9(0.5,-1.868) 10(1,-1.868) 16(1,1.868) 17(0.5,1.868) 18(0,1.868) 19(-0.5,1.868) 20(-1,1.868)
  rect 2.15x2.15 smd: 21(0,0)
  silkscreen extent -2.73,-2.08 2.08,2.08
LFCSP-WQ-16_L4.0-W4.0-P0.65-EP2.3-BL-EP [mm]
  rect 0.35x0.7 smd: 1(-0.975,-2) 2(-0.325,-2) 3(0.325,-2) 4(0.975,-2) 9(0.975,2) 10(0.325,2) 11(-0.325,2) 12(-0.975,2)
  rect 0.7x0.35 smd: 5(2,-0.975) 6(2,-0.325) 7(2,0.325) 8(2,0.975) 13(-2,0.975) 14(-2,0.325) 15(-2,-0.325) 16(-2,-0.975)
  rect 2.25x2.25 smd: 17(0,0)
  silkscreen extent -2,-2.56 2,2
R0201 [mil] "R0201"
  rect 14x14 smd: 1(-12,0) 2(12,0)
  silkscreen extent -1,-8 1,8
R1206 [mil] "R1206"
  rect 50x67 smd: 1(-61.5,0) 2(61.5,0)
  silkscreen extent -7,-38 7,38
TLV62130RGT [mil]
  oval 11x33.5 smd: 1(-29.5,-58.6) 2(-9.8,-58.6) 3(9.8,-58.6) 4(29.5,-58.6) 9(29.5,57.6) 10(9.8,57.6) 11(-9.8,57.6) 12(-29.5,57.6)
  oval 33.5x11 smd: 5(58.1,-30) 6(58.1,-10.3) 7(58.1,9.3) 8(58.1,29) 13(-58.1,29) 14(-58.1,9.3) 15(-58.1,-10.3) 16(-58.1,-30)
  rect 66.9x66.9 smd: 20(0,-0.5)
  silkscreen extent -59,-94 59,59
TPC75D45 [mil] "TPC75D45"
  round 75 smd: 1(0,0)
  silkscreen extent -45,-45 45,45
TSML150W160H160 [mil] "TSML150W160H160"
  rect 30x65.01 smd: 1(-50,62.5) 2(0,62.5) 3(50,62.5) 4(50,-62.5) 5(0,-62.5) 6(-50,-62.5)
  silkscreen extent -90,-110 90,110
TSSOP8 [mil] "TSSOP8"
  rect 13x65 smd: 1(-38.39,-114.96) 2(-12.8,-114.96) 3(12.8,-114.96) 4(38.39,-114.96) 5(38.39,114.96) 6(12.8,114.96) 7(-12.8,114.96) 8(-38.39,114.96)
  silkscreen extent -71,-99 71,99
XTALNX3225 [mil] "XTALNX3225"
  rect 55.01x47 smd: 1(-43.32,-31.51) 2(43.3,-31.51) 3(43.3,31.5) 4(-43.32,31.5)
  silkscreen extent -86,-70 86,70

## Part data
C1 C2 C3 C4 C5 C6 C7 C12 C13 C14 C15 C16 C17 C20 C30 C31 C32 C33 C34 C35 C36 C39 C48 C49 C50 C51 C56 C57 C58 C59 C61 C63 C64 C65 C66 C67 C68 C69 C70 C71 C73 C74 C75 C83: BOM_Manufacturer=WTC, BOM_Manufacturer Part=0402B104K160, BOM_Supplier=LCSC, BOM_Supplier Part=C83056, nameAlias=Capacitance, spicePre=C, spiceSymbolName=0402B104K160
C8 C9 C10 C11 C18 C19 C21 C22 C23 C24 C26 C27 C37 C38 C40 C41 C42 C43 C44 C45 C46 C47 C52 C53 C54 C55: library part 10UF, BOM_Manufacturer=WTC, BOM_Manufacturer Part=0402B104K160, BOM_Supplier=LCSC, BOM_Supplier Part=C83056, nameAlias=Capacitance, spicePre=C, spiceSymbolName=0402B104K160
C25 C28 C29: library part CAP_3, "Capacitor"
C62 C77 C79: library part 0.1UF, BOM_Manufacturer=WTC, BOM_Manufacturer Part=0402B104K160, BOM_Supplier=LCSC, BOM_Supplier Part=C83056, nameAlias=Capacitance, spicePre=C, spiceSymbolName=0402B104K160
C72 C76 C80 C82: library part 18PF, BOM_Manufacturer=WTC, BOM_Manufacturer Part=0402B104K160, BOM_Supplier=LCSC, BOM_Supplier Part=C83056, nameAlias=Capacitance, spicePre=C, spiceSymbolName=0402B104K160
C78 C81: library part 100PF, BOM_Manufacturer=WTC, BOM_Manufacturer Part=0402B104K160, BOM_Supplier=LCSC, BOM_Supplier Part=C83056, nameAlias=Capacitance, spicePre=C, spiceSymbolName=0402B104K160
DS1: BOM_Manufacturer="Everlight Elec", BOM_Manufacturer Part=16-213SURC/S530-A3/TR8, BOM_Supplier=LCSC, BOM_Supplier Part=C605452, Contributor=LCSC, spicePre=L, spiceSymbolName=16-213SURC/S530-A3/TR8
E1 E2 E3: library part 100OHM, BOM_Manufacturer=Murata, BOM_Manufacturer Part=BLM21PG221SN1x, BOM_Supplier=LCSC, Contributor=prophetC, spicePre=L, spiceSymbolName="220ohm at 100MHz"
L1 L2: library part INDUCTANCE_1, "Inductance"
L3 L4 L5 L6: BOM_JLCPCB SMD=Yes, BOM_Manufacturer=Sunlord, BOM_Manufacturer Part=GZ1608D121TF, BOM_Supplier=LCSC, BOM_Supplier Part=C12391, nameAlias=Value, SMT Type=Extend, spicePre=L, spiceSymbolName=GZ1608D121TF-C12391
P2: "Header, 10-Pin, Dual row", LatestRevisionDate=17-Jul-2002, LatestRevisionNote="Re-released for DXP Platform.", Publisher="Altium Limited"
P4: "Header, 3-Pin", LatestRevisionDate=17-Jul-2002, LatestRevisionNote="Re-released for DXP Platform.", Publisher="Altium Limited"
R1 R8 R36 R37 R39 R40 R41: library part 1, BOM_Manufacturer=YAGEO, BOM_Manufacturer Part=RC0402FR-0780R6L, BOM_Supplier=LCSC, BOM_Supplier Part=C185392, Contributor=LCSC, nameAlias="Resistance (Ohms)", spicePre=R, spiceSymbolName=RC0402FR-0780R6L
R2 R9 R23 R24 R25 R26 R27 R28 R33: library part 10K, BOM_Manufacturer=YAGEO, BOM_Manufacturer Part=RC0402FR-0780R6L, BOM_Supplier=LCSC, BOM_Supplier Part=C185392, Contributor=LCSC, nameAlias="Resistance (Ohms)", spicePre=R, spiceSymbolName=RC0402FR-0780R6L
R3 R4 R10 R11 R12 R17 R18 R19 R20 R21 R22 R29 R30 R31 R32 R34 R35 R38 R42: BOM_Manufacturer=YAGEO, BOM_Manufacturer Part=RC0402FR-0780R6L, BOM_Supplier=LCSC, BOM_Supplier Part=C185392, Contributor=LCSC, nameAlias="Resistance (Ohms)", spicePre=R, spiceSymbolName=RC0402FR-0780R6L
R5 R6 R7: library part RES, "Resistor"
R13: library part 10R, BOM_Manufacturer=YAGEO, BOM_Manufacturer Part=RC0402FR-0780R6L, BOM_Supplier=LCSC, BOM_Supplier Part=C185392, Contributor=LCSC, nameAlias="Resistance (Ohms)", spicePre=R, spiceSymbolName=RC0402FR-0780R6L
R14: library part 39, BOM_Manufacturer=YAGEO, BOM_Manufacturer Part=RC0402FR-0780R6L, BOM_Supplier=LCSC, BOM_Supplier Part=C185392, Contributor=LCSC, nameAlias="Resistance (Ohms)", spicePre=R, spiceSymbolName=RC0402FR-0780R6L
R15 R16: library part 1K, BOM_Manufacturer=YAGEO, BOM_Manufacturer Part=RC0402FR-0780R6L, BOM_Supplier=LCSC, BOM_Supplier Part=C185392, Contributor=LCSC, nameAlias="Resistance (Ohms)", spicePre=R, spiceSymbolName=RC0402FR-0780R6L
REF_CLK RF1 RF2 RX1A RX2A TX1A TX2A: BOM_Manufacturer=dosinconn, BOM_Manufacturer Part=DOSIN-806-0010, BOM_Supplier=LCSC, BOM_Supplier Part=C521221, Contributor=LCSC, spicePre=R, spiceSymbolName=DOSIN-806-0010
TP101 TP102 TP238 TP239 TP240 TP241 TP243 TP244 TP245 TP246 TP247: library part "TEST POINT SURFACE_1"
U2 U4 U5: BOM_Manufacturer="Analog Devices", BOM_Paste Type=expand, BOM_Supplier=LCSC, Contributor=LCSC, spicePre=U
  U2 U4: BOM_Manufacturer Part=ADP1755ACPZ-R7, BOM_Supplier Part=C403695, spiceSymbolName=ADP1755ACPZ-R7
  U5: BOM_Manufacturer Part=AD7291BCPZ-RL7, BOM_Supplier Part=C207434, spiceSymbolName=AD7291BCPZ-RL7
U6: BOM_Manufacturer=STMicroelectronics, BOM_Manufacturer Part=M24C02-WDW6TP, BOM_Paste Type=expand, BOM_Supplier=LCSC, BOM_Supplier Part=C283436, Contributor=LCSC, spicePre=U, spiceSymbolName=M24C02-WDW6TP
X1: library part 30MHz, BOM_Manufacturer=NDK, BOM_Manufacturer Part=NX3225SA-30M, BOM_Supplier=LCSC, BOM_Supplier Part=C139739, Contributor=LCSC, nameAlias=Frequency, spicePre=X, spiceSymbolName=NX3225SA-30M
T1 T2 T3 T4: Contributor=GaAs, spicePre=T, spiceSymbolName=TCM1-63AX+
U1: Contributor=fumanduo, spicePre=U, spiceSymbolName=AD9363_PLUTO

## Via types
v1: diameter 15.75, hole 7.87, Top Layer to Bottom Layer, tented both sides, 155 vias
v2: diameter 20, hole 10, Top Layer to Bottom Layer, 145 vias
v3: diameter 16, hole 8, Top Layer to Bottom Layer, 68 vias

## Nets (pads, with @x,y where several pads share a name; then routed paths per layer and width w, separated by ;. In a path a pad name is that pad's centre, name@x,y a point inside that pad or via, vN(x,y) a via of type N, cw(c..) or ccw(c..) an arc to the next point about the centre after c; other vN are vias at no path point)
1P3_SUPPLY_A: C18.1 C19.1 C21.1 C22.1 C23.1 C24.1 C26.1 C27.1 R1.2 R19.1 TP241.1 U1.B9 U1.B10 U1.E2 U1.F2 U1.J3 U1.K3 | length 1892.3
  Top Layer w10: v1(2999.25,3027.01) v1@2999.25,3027.69 ; C23.1@2999.25,3042.43 ccw(c2996.43,3047.5) C23.1@3002.23,3047.5 ; C21.1@3009.64,3185.75 cw(c3007.17,3180.76) C21.1@3012.74,3180.76
  Top Layer w15.5: 2946.73,3033.75 2946.73,3035.25 ; C18.1@2991.73,3254.5 2999.73,3254.5 3003.98,3250.25 3011.48,3242.79 3011.48,3235.25 v1(3030.75,3215.98) ; v1(3251.22,2932.52) C26.1@3267.71,2932.52 ; v2(4358,2066) R19.1@4358,2128
  Top Layer w17: v1@3280.66,2932.52 C22.1@3328.96,2884.22 ; C22.1@3328.96,2875.01 v2(3352.71,2851.26)
  Top Layer w20: v2(2597.74,3306.26) v2(2632.74,3306.26) 2721.49,3306.26 2833.99,3193.76 2943.99,3193.76 2947.74,3197.51 2959.5,3185.75 3009.64,3185.75 v1(3029.26,3185.75) ; v2(2599.23,2905) v2(2634.23,2905) 2721.73,2905 2846.73,3030 2941.48,3030 2946.73,3035.25 2991.01,3035.25 2998.57,3027.69 2999.25,3027.69 C23.1@2999.25,3042.43 ; v2(2599.23,3410) v2(2634.23,3410) 2744.23,3410 2911.73,3242.5 2955.48,3242.5 2959.23,3246.25 2972.48,3254.5 C18.1@2991.73,3254.5 ; 2999.25,3035.25 C23.1@2999.25,3042.43 ; C23.1@2999.25,3047.5 v1(2999.25,3058.5) C23.1@2999.25,3042.43 ; C26.1@3267.71,2932.52 v1@3280.66,2932.52 ; v2(3352.71,2816.26) v2(3352.71,2851.26)
  Bottom Layer w10: v1(2999.25,3027.01) U1.E2@3015,3042.76 ; v1(2999.25,3058.5) U1.F2@3015,3074.25 ; v1(3029.26,3185.75) U1.J3@3045,3170 ; v1(3030.75,3215.98) U1.K3@3046.49,3200.24 ; U1.B9@3235.47,2948.27 v1(3251.22,2932.52) ; U1.B10@3266.97,2948.27 v1(3282.72,2932.52)
1P3_SUPPLY_B: C37.1 C38.1 C40.1 C41.1 C42.1 C43.1 C44.1 C45.1 C46.1 C47.1 C71.2 C72.2 C75.2 C76.2 L3.1 L4.1 L5.1 L6.1 R8.2 R17.1 TP244.1 U1.A9 U1.A10 U1.D2 U1.D3 U1.E3 U1.F12 U1.K4 U1.M9 U1.M10 | length 2689.7
  Top Layer w10: v1(3260,2890) 3261,2891 3290,2891 v1(3291,2892)
  Top Layer w12: C44.1@3287.01,2868.48 3287.01,2850.98 3296.26,2841.73 C47.1@3296.26,2834 ; C44.1@3287.01,2875.98 3291,2879.97 v1(3291,2892)
  Top Layer w15: v1(3030.75,2995.51) v1(3030.75,3027.01)
  Top Layer w15.5: v3@3104.15,2767.85 3118.05,2781.75 3139.75,2781.75 3154.75,2781.75 3167.25,2794.25 C75.2@3190,2794.25 ; v3(3278.41,2777.5) 3296.26,2795.35 C47.1@3296.26,2834 ; v2(4557,2066) R17.1@4557,2128
  Top Layer w17: C41.1@2952.23,2989.75 C42.1@2987.48,2989.75
  Top Layer w18: C45.1@3035.48,3306.25 3037.75,3306.25 3040.5,3303.5 3040.5,3301.23 3051.5,3290.23 3051.5,3256.25 3062,3245.75 3062,3216.22 v1(3062.24,3215.98)
  Top Layer w20: v2(2599.23,2790) v2(2634.23,2790) 2721.73,2790 2912.98,2981.25 2941.73,2981.25 2942.73,2980.25 C41.1@2952.23,2989.75 ; v2(2599.23,3835) v2(2639.23,3835) 2719.23,3835 2961.73,3592.5 2961.73,3380 C45.1@3035.48,3306.25 ; C42.1@2987.48,2989.75 2993.49,2989.75 v1(2999.25,2995.52) v1(3030.75,2995.51) ; C75.2@3190.01,2796.25 3259.66,2796.25 v3(3278.41,2777.5) ; 3278.41,2766.6 3315.01,2730 ; 3315.01,2581.5 3315.01,2629 3315.01,2706 ; 3474.01,2809 3383.01,2718 3327.01,2718 ; 3315.01,2706 3327.01,2718 ; 3315.01,2706 3315.01,2730 ; 3315.01,2730 3327.01,2718
  Bottom Layer w10: v1(3030.75,2995.51) U1.D3@3046.49,3011.26 ; v1(3030.75,3027.01) U1.E3@3046.49,3042.76 ; v1(3062.24,3215.98) U1.K4@3077.99,3200.24 ; U1.A9@3235.47,2916.77 v1@3259.5,2892.74 ; U1.M9@3235.47,3263.23 v1(3251.22,3278.98) ; U1.A10@3266.97,2916.77 3291,2892.74 v1(3291,2892) ; U1.M10@3266.97,3263.23 v1(3282.72,3278.98) ; v1(3314.22,3058.51) U1.F12@3329.96,3074.25 ; v1(2999.25,2995.52) U1.D2@3015,3011.26 v1(2999.25,2995.52)
  Bottom Layer w15.5: L5.1@3071,2803 v3(3104.39,2769.61) ; L4.1@3129,3393 v3(3160.28,3424.28) ; v3@3275.88,2775.01 L6.1@3311.38,2810.51 ; v3(3319.72,3423.28) L3.1@3351,3392
1P8V: C1.2 C25.2 C30.2 E2.2 L2.2 R5.1 R6.1 R13.2 U2.1 U2.2 U2.3 U2.15 U2.16 U3.14 U4.1 U4.2 U4.3 U4.15 U4.16
3.3VAUX: C59.2 C63.1 C64.1 P1.D32 R15.2 R16.2 R20.1 TP238.1 U5.10 U5.16 U5.17 U6.8 | length 439.4
  Top Layer w11: v3(4309.04,2375.77) 4323.15,2389.88 U5.16@4346.79,2389.89 ; v3@4314.1,2370.21 U5.17@4346.79,2370.21 ; U5.10@4493.84,2389.89 4526.21,2389.89 4531.84,2395.52
  Top Layer w15.5: v2(4264,2066) R20.1@4264,2128 ; 4531.84,2395.52 4554.34,2418.02 C64.1@4582.09,2418.02 ; C64.1@4582.34,2418.27 4582.34,2473.02 v3(4582.34,2495.52) ; U6.8@4868.22,4313.92 4868.22,4377.85 ; 4869.61,4378.96 v3(4869.61,4398.96) ; R16.2@4939,4413 v3(4939,4433) ; R15.2@4986.5,4413 v3(4986.5,4433)
3P3V: C2.1 C3.1 L1.1 P1.C39 P1.D36 P1.D38 P1.D40 P4.1 R21.1 TP239.1 | length 346
  Top Layer w15.5: v2(4164,2066) R21.1@4164,2128
  Top Layer w20: v2(5314.18,3865) P1.D36@5360,3865 ; v2(5314.18,3965) P1.D38@5360,3965 ; v2(5314.18,4065) P1.D40@5360,4065 v2(5360,4100) ; v2(5385.85,3991.78) P1.C39@5409.07,4015 ; v2(5386.78,4039.15) P1.C39@5410,4015.93 ; P1.C39@5410,4015 v2(5455.82,4015)
12V: P1.C35 P1.C37 P4.3 | length 213.1
  Top Layer w15.5: v2(5455.82,3815) 5481.73,3840.91 5481.73,3889.09 v2(5455.82,3915)
  Top Layer w20: P1.C35@5410,3815 v2(5455.82,3815) ; P1.C37@5410,3915 v2(5455.82,3915)
AUXADC: C58.1 TP245.1 U1.L5 | length 1303.4
  Top Layer w4: v1(3093.75,3247.48) 3108.27,3262 3127.89,3262 3133.89,3268 C58.1@3146,3268
  Layer 2 w4: 2462,3106 2612,2956 2767,2956 2879,2844 3097,2844 3124,2871 3124,2908.5 3110,2922.5 3110,2999.91 3121.22,3011.13 3131.13,3011.13 3141,3021 3141,3030.87 3129.49,3042.38 3119.62,3042.38 3110,3052 3110,3126 3095,3141 3095,3160.31 3110,3175.31 3110,3219.36 3095.75,3233.61 3095.75,3245.48 v1(3093.75,3247.48)
  Bottom Layer w10: v1(3093.75,3247.48) U1.L5@3109.49,3231.73
AUXDAC1: C56.1 TP247.1 U1.B3 | length 39.6
  Top Layer w15.5: C56.1@3024.48,2917.76 3030.74,2924.02 v1(3030.74,2932.53)
  Bottom Layer w10: v1(3030.74,2932.53) U1.B3@3046.49,2948.27
AUXDAC2: C57.1 TP246.1 U1.C3 | length 22.3
  Bottom Layer w10: v1(3030.74,2964.02) U1.C3@3046.49,2979.76
CLK_OUT: P1.H4 U1.J6 | length 3035.7
  Top Layer w15.5: 4779.23,2557.5 5071.73,2265 P1.H4@5160,2265
  Layer 2 w4: v1(3125.23,3153) 3150,3153 3170.61,3132.39 3170.61,2962.01 3182.48,2950.14 3190.23,2950.14 3203.82,2936.55 3203.82,2928.8 3213.66,2918.96 3213.66,2798.66 4008.31,2004 4986,2004
  Bottom Layer w10: v1(3125.23,3153) U1.J6@3140.98,3168.74
CTRL_IN0: P1.H28 P2.20 R31.2 U1.C5 | length 4068
  Top Layer w4: P2.20@4865,3631 4814,3580 4814,3457 4835,3436 5131,3436 P1.H28@5160,3465
  Top Layer w15.5: P2.20@4864.5,3631.5 R31.2@4864.5,3696
  Layer 2 w4: v1(3093.74,2964.02) 3080,2950.28 3080,2938.6 3079.87,2938.46 3079.87,2925.13 3062.43,2907.7 3062.43,2890.43 3050,2878 2924.69,2878 2826,2976.69 2826,3564 3250,3988 3590.31,3988 3635.31,4033 4160,4033 4374,3819 4374,3791.31 4511.5,3653.81 4511.5,3630.05 4550.55,3591 4825,3591 P2.20@4865,3631
  Bottom Layer w10: v1(3093.74,2964.02) U1.C5@3109.49,2979.76
CTRL_IN1: P1.H29 P2.19 R30.2 U1.C6 | length 5745.8
  Top Layer w4: P2.19@4865,3531 4992,3531 5008,3515 P1.H29@5160,3515
  Top Layer w15.5: R30.2@4864.5,3461 4864.5,3485.24 ; 4865,3485.74 P2.19@4865,3531
  Layer 2 w4: v1(3125.23,2964.02) 3125.23,2931.87 3161.12,2895.98 3161.12,2736.25 4087.37,1810 5392.31,1810 5569,1986.69 5569,3490 5524.5,3534.5 5439.5,3534.5 5430,3525 5362,3525 5341,3546 5170,3546 5154.5,3530.5 5154,3531 P2.19@4865,3531
  Bottom Layer w10: v1(3125.23,2964.02) U1.C6@3140.98,2979.76
CTRL_IN2: P1.G27 P2.18 R32.2 U1.D6 | length 5772
  Top Layer w4: P2.18@4765,3631 4765,3674 ; R32.2@4766,3696 4766,3724 4785,3743 4914,3743 5098.18,3558.82 5098.18,3558.37 5107.55,3549 5108,3549 5116,3541 5162,3541 5184,3519 5184,3441 P1.G27@5210,3415
  Top Layer w15.5: P2.18@4765.5,3631.5 R32.2@4765.5,3696 ; P1.G27@5210,3415 v2(5255.82,3415)
  Layer 2 w4: v1(3125.23,2995.52) 3127.48,2993.27 3127.48,2982.09 3139.45,2970.12 3139.45,2930.18 3169.12,2900.51 3169.12,2739.56 4090.69,1818 5389,1818 5561,1990 5561,3455 5526,3490 5362,3490 5287,3415 v2(5255.82,3415)
  Bottom Layer w10: v1(3125.23,2995.52) U1.D6@3140.98,3011.26
CTRL_IN3: P1.G28 P2.17 R29.2 U1.D5 | length 3892.9
  Top Layer w15.5: 4765,3485.74 P2.17@4765,3531 ; R29.2@4765.5,3461 4765.5,3485.24 ; P1.G28@5210,3465 v2(5255.82,3465)
  Layer 2 w4: v1(3093.74,2995.52) 3079,2980.78 3079,2961.16 3064.24,2946.4 3056.49,2946.4 3044.61,2934.52 3044.61,2926.78 3021.83,2904 2937.69,2904 2855,2986.69 2855,3536 3214,3895 3602,3895 3692,3985 4146,3985 4277,3854 4277,3784 4326,3735 4419,3735 4503.5,3650.5 4503.5,3593.5 4522,3575 4721,3575 4834,3462 5252.82,3462 v2(5255.82,3465)
  Bottom Layer w10: v1(3093.74,2995.52) U1.D5@3109.49,3011.26
CTRL_OUT0: P1.G21 P2.11 U1.D4 | length 3841.4
  Top Layer w4: v3(4204,3770) 4236,3738 4338,3738 4413,3663 4413,3583 P2.11@4465,3531 4465,3438 4658,3245 5156.16,3245 5183,3218.16 5183,3199 5195,3187 5227,3187 5243,3171 5243,3148 P1.G21@5210,3115
  Layer 2 w4: v1(3062.24,2995.52) 3060.23,2993.51 3048.37,2993.51 3035.31,2980.45 3027.55,2980.45 3016.87,2969.77 3016.87,2956.87 3010.15,2950.15 2997.25,2950.15 2990.1,2943 2943,2943 2909,2977 2909,3426 2961,3478 2961,3612 3182,3833 3655,3833 3774,3952 4090,3952 4203,3839 v3@4203,3772
  Bottom Layer w10: v1(3062.24,2995.52) U1.D4@3077.99,3011.26
CTRL_OUT1: P1.G22 P2.10 U1.E4 | length 3634.7
  Top Layer w4: v1(3062.25,3027.02) 3060.25,3029.02 3060.25,3040.89 3046,3055.14 3046,3082.64 3048.13,3084.77 3048.13,3189.99 3058.02,3199.88 3067.35,3199.88 3079.88,3212.4 3079.88,3221.74 3090.14,3232 3425,3232 3541,3116 4502,3116 4523,3137 5158.16,3137 5186.16,3165 ; P2.10@4365,3631 4312,3578 4312,3461 4581,3192 5159.16,3192 5186.16,3165 ; P1.G22@5210,3165 5186.16,3165
  Bottom Layer w10: v1(3062.25,3027.02) U1.E4@3077.99,3042.76
CTRL_OUT2: P1.H25 P2.9 U1.E5 | length 3587.2
  Top Layer w15.5: v2(5114.18,3315) P1.H25@5160,3315
  Layer 2 w4: v1(3093.74,3027.02) 3076.72,3010 2992,3010 2917,3085 2917,3399 2970,3452 2970,3606 3174,3810 3663,3810 3789,3936 4080,3936 4156.5,3859.5 4156.5,3768 4183,3741.5 4183,3679 4217,3645 4217,3605 4245,3577 4307.69,3577 4353.69,3531 P2.9@4365,3531 4365,3402 4483,3284 4920,3284 4961,3325 5101.55,3325 5111.55,3315 v2(5114.18,3315)
  Bottom Layer w10: v1(3093.74,3027.02) U1.E5@3109.49,3042.76
CTRL_OUT3: P1.H26 P2.8 U1.E6 | length 3835.6
  Top Layer w15.5: v2(5114.18,3365) P1.H26@5160,3365
  Layer 2 w4: v1(3125.23,3027.02) 3107.6,3009.39 3087.99,3009.39 3076.11,2997.51 3076.11,2989.77 3066.34,2980 3058.6,2980 3047,2968.4 3047,2958 3035.4,2946.4 3024.99,2946.4 3016.87,2938.28 3016.87,2921.87 3007,2912 2941,2912 2895,2958 2895,3423.31 2953,3481.31 2953,3622.69 3184.31,3854 3634,3854 3741.5,3961.5 4112.5,3961.5 4231,3843 4231,3665 4310,3586 4375,3586 4413.5,3547.5 4413.5,3415.5 4502,3327 4904,3327 4942,3365 v2(5114.18,3365)
  Bottom Layer w10: v1(3125.23,3027.02) U1.E6@3140.98,3042.76
CTRL_OUT4: P1.G24 P2.7 U1.F6 | length 3875.5
  Top Layer w4: v1@3063.5,3091.5 3082.49,3072.51 3111.23,3072.51 v1(3125.23,3058.51) ; v3(3964,3779) 4117,3779 4180,3716 4180,3687.5 4223,3644.5 4223,3588 P2.7@4271.5,3539.5 ; P2.7@4265,3531 4265,3407 4464.5,3207.5 4464.5,3161.5 v3@4491,3135
  Top Layer w15.5: v2(5185,3290) P1.G24@5210,3265
  Layer 2 w4: v1(3062,3090) 3059.76,3092.24 3048.13,3092.24 3036.49,3103.88 3025.12,3103.88 3016.87,3112.13 3016.87,3128.13 2941,3204 2941,3304 3034,3397 3034,3468 3223,3657 3678,3657 3802,3781 v3@3964,3781 ; v3@4493,3137 4504,3148 5374,3148 5416,3190 5416,3257 5383,3290 v2(5185,3290)
  Bottom Layer w10: v1(3125.23,3058.51) U1.F6@3140.98,3074.25
  other v3: 4491.31,3134.63
CTRL_OUT5: P1.G25 P2.6 U1.F5 | length 3530.6
  Top Layer w15.5: v2(5185,3340) P1.G25@5210,3315
  Layer 2 w4: v1(3093.74,3058.51) 3077.23,3042 2996.13,3042 2985.38,3052.75 2985.38,3063.62 2925,3124 2925,3367 2979,3421 2979,3568 3186,3775 3705,3775 3785,3855 4023,3855 4131,3747 4131,3680 4165,3646 P2.6@4165,3631 4213,3583 4213,3364 4329,3248 4937,3248 4964,3275 5041.5,3275 5056.5,3290 5135,3290 v2(5185,3340)
  Bottom Layer w10: v1(3093.74,3058.51) U1.F5@3109.49,3074.25
CTRL_OUT6: P1.D23 P2.5 U1.F4 | length 3495.2
  Top Layer w15.5: v2(5335,3240) P1.D23@5360,3215
  Layer 2 w4: v1(3062.25,3058.51) 3048.76,3072 3036.88,3072 3032.74,3076.14 3024.99,3076.14 3013.12,3088.01 3013.12,3095.76 3002.88,3106 2970.34,3106 2933,3143.34 2933,3324 2997,3388 2997,3531 3136,3670 3653,3670 3797,3814 3985,3814 4038.5,3760.5 4038.5,3733.5 4119,3653 4119,3577 P2.5@4165,3531 4165,3395 4334,3226 4938,3226 4961,3249 5122.5,3249 5125.5,3252 5323,3252 v2(5335,3240)
  Bottom Layer w10: v1(3062.25,3058.51) U1.F4@3077.99,3074.25
CTRL_OUT7: P1.D24 P2.4 U1.G4 | length 3267.4
  Top Layer w15.5: P1.D24@5360,3265 v2(5385,3240)
  Layer 2 w4: v1(3062.25,3121.5) 3050.75,3133 3041.88,3133 3037.88,3137 3024,3137 2985.38,3175.62 2985.38,3334.38 3050,3399 3050,3433 3265,3648 3693,3648 3789,3744 3955,3744 4065,3634 P2.4@4065,3631 4107.5,3588.5 4107.5,3402.5 4292,3218 5049,3218 5079,3188 5333,3188 v2(5385,3240)
  Bottom Layer w10: v1(3062.25,3121.5) U1.G4@3077.99,3105.75
DATA_CLK_N: P1.G7 U1.H11 | length 2391.5
  Top Layer w4.96: v1(5190.64,2396.46) P1.G7@5209.18,2415
  Layer 2 w4.02: v1(3314.21,3121.49) 3316.35,3121.49 3345.98,3151.12 3358.88,3151.12 3366.48,3143.52 3393,3143.52 3407.5,3129.02 3488.74,3129.02 4379.58,2238.18 4860.58,2238.18 4998.37,2375.97 5188.29,2375.97 5190.64,2378.32 v1(5190.64,2396.46)
  Bottom Layer w4.96: U1.H11@3298.46,3137.24 v1(3314.21,3121.49)
DATA_CLK_P: P1.G6 U1.G11 | length 2424.3
  Top Layer w4.96: v1(5190.64,2346.46) P1.G6@5209.18,2365
  Layer 2 w4.02: v1(3282.71,3121.5) 3284.76,3119.45 3296.61,3119.45 3308.46,3107.61 3322.61,3107.61 3334.63,3119.63 3354.63,3119.63 3369.25,3134.25 3389.51,3134.25 3403.76,3120 3485,3120 4375.84,2229.16 4864.32,2229.16 5002.11,2366.95 5188.29,2366.95 5190.64,2364.6 v1(5190.64,2346.46)
  Bottom Layer w4.96: v1(3282.71,3121.5) U1.G11@3298.46,3105.75
EN_AGC: P1.H22 P2.3 U1.G5 | length 3091.7
  Top Layer w15.5: v2(5114.18,3165) P1.H22@5160,3165
  Layer 2 w4: v1(3093.74,3090.01) 3078,3105.75 3078,3125.37 3064.25,3139.12 3056.5,3139.12 3044.61,3151.01 3044.61,3158.74 3035.35,3168 3019,3168 3012,3175 3012,3209.12 3016.88,3214 3016.88,3318.88 3080,3382 3080,3437 3222,3579 3776,3579 3830,3633 3830,3697 3849,3716 3959,3716 4013,3662 4013,3614 4059.84,3567.16 4059.84,3536.16 P2.3@4065,3531 4063,3529 4063,3299 4197,3165 v2(5114.18,3165)
  Bottom Layer w10: v1(3093.74,3090.01) U1.G5@3109.49,3105.75
ENABLE: P1.G18 P2.1 U1.G6 | length 2994.3
  Top Layer w15.5: P1.G18@5210,2965 v2(5255.82,2965)
  Layer 2 w4: v1(3125.23,3090.01) 3139.11,3103.89 3139.11,3127.24 3127.22,3139.13 3119.48,3139.13 3111.36,3147.25 3111.36,3158.75 3138.68,3186.07 3139.11,3186.07 3139.11,3224.89 3130.69,3233.31 3119.79,3233.31 3109,3244.1 3109,3317 3320,3528 3962,3528 P2.1@3965,3531 3968,3528 3968,3291 4314,2945 4974.31,2945 5020.31,2991 5229.82,2991 v2(5255.82,2965)
  Bottom Layer w10: v1(3125.23,3090.01) U1.G6@3140.98,3105.75
FB_CLK_N: P1.G13 U1.G10 | length 2796.4
  Top Layer w4.96: v1(5191.46,2695.64) P1.G13@5210,2714.18
  Layer 2 w4.02: v1(3251.22,3121.5) 3262.46,3110.26 3274.32,3110.26 3284.99,3099.59 3338.76,3099.59 3346.48,3091.87 3459.65,3091.87 4330.38,2221.14 4976.48,2221.14 5082.86,2327.51 5193.83,2327.51 5217,2350.68 5217,2670.1 v1(5191.46,2695.64)
  Bottom Layer w4.96: v1(3251.22,3121.5) U1.G10@3266.97,3105.75
FB_CLK_P: P1.G12 U1.F10 | length 2788.9
  Top Layer w4.96: P1.G12@5210,2665.82 v1(5228.54,2684.36)
  Layer 2 w4.02: v1(3251.22,3090) 3262.46,3101.24 3270.58,3101.24 3281.25,3090.57 3335.02,3090.57 3342.57,3083.02 3455.74,3083.02 4249.45,2289.31 4250.87,2289.31 4327.06,2213.12 4979.81,2213.12 5086.18,2319.49 5197.15,2319.49 5225.02,2347.36 5225.02,2677.67 5228.54,2681.19 v1(5228.54,2684.36)
  Bottom Layer w4.96: v1(3251.22,3090) U1.F10@3266.97,3074.25
GA0: P1.C34 U5.11 U6.2 | length 4617.6
  Top Layer w4: v3(4465.31,2462.05) 4527.27,2524 4626,2524 4678,2472 4678,2268 4602,2192 4602,1979 4677.98,1903.02 5473.66,1903.02 5560.98,1990.34 5560.98,3698.02 5494,3765 v2(5455.82,3765)
  Top Layer w11: U5.11@4459.69,2424.05 4459.69,2456.42 v3(4465.31,2462.05)
  Top Layer w15.5: U6.2@4893.81,4084 v3(4893.81,4136.16) ; P1.C34@5410,3765 v2(5455.82,3765)
  Layer 2 w4: v3(4893.81,4136.16) 4893.81,3949.19 5001,3842 5383,3842 5455.82,3769.18 v2(5455.82,3765)
GA1: P1.D35 U5.13 U6.1 | length 4711.5
  Top Layer w4: v3(4420.31,2479.55) 4493.77,2553 4629.69,2553 4686,2496.69 4686,2256 4610,2180 4610,1982.31 4681.29,1911.02 5470.35,1911.02 5552.98,1993.65 5552.98,3663.02 5476,3740 5404,3740 5386,3758 5386,3770.66 5360.16,3796.5 5360.16,3814.84 P1.D35@5360,3815
  Top Layer w11: U5.13@4420.31,2424.05 v3(4420.31,2479.55)
  Top Layer w15.5: v3(4854.11,4136.46) 4868.22,4122.35 U6.1@4868.22,4084 ; v2(5314.18,3815) P1.D35@5360,3815
  Layer 2 w4: v3(4854.11,4136.46) 4854.11,3928.89 4994,3789 5288.18,3789 v2(5314.18,3815)